# Altium PCB S7CAS-PLEIADES-CARTE-MERE_P01.PcbDoc (part 2 of 3)
Units mil, origin at the board's own origin, x right, y up, seen from the top; angles counter-clockwise.
Board outline 5000 x 5000 mil, 4 copper layers (Top, Ground Plane, Power Plane, Bottom), stack 67.086 mil thick; 430 components, 327 nets, 2174 pads, 171 vias.
Unrouted connection lines stored in the file: 1387.
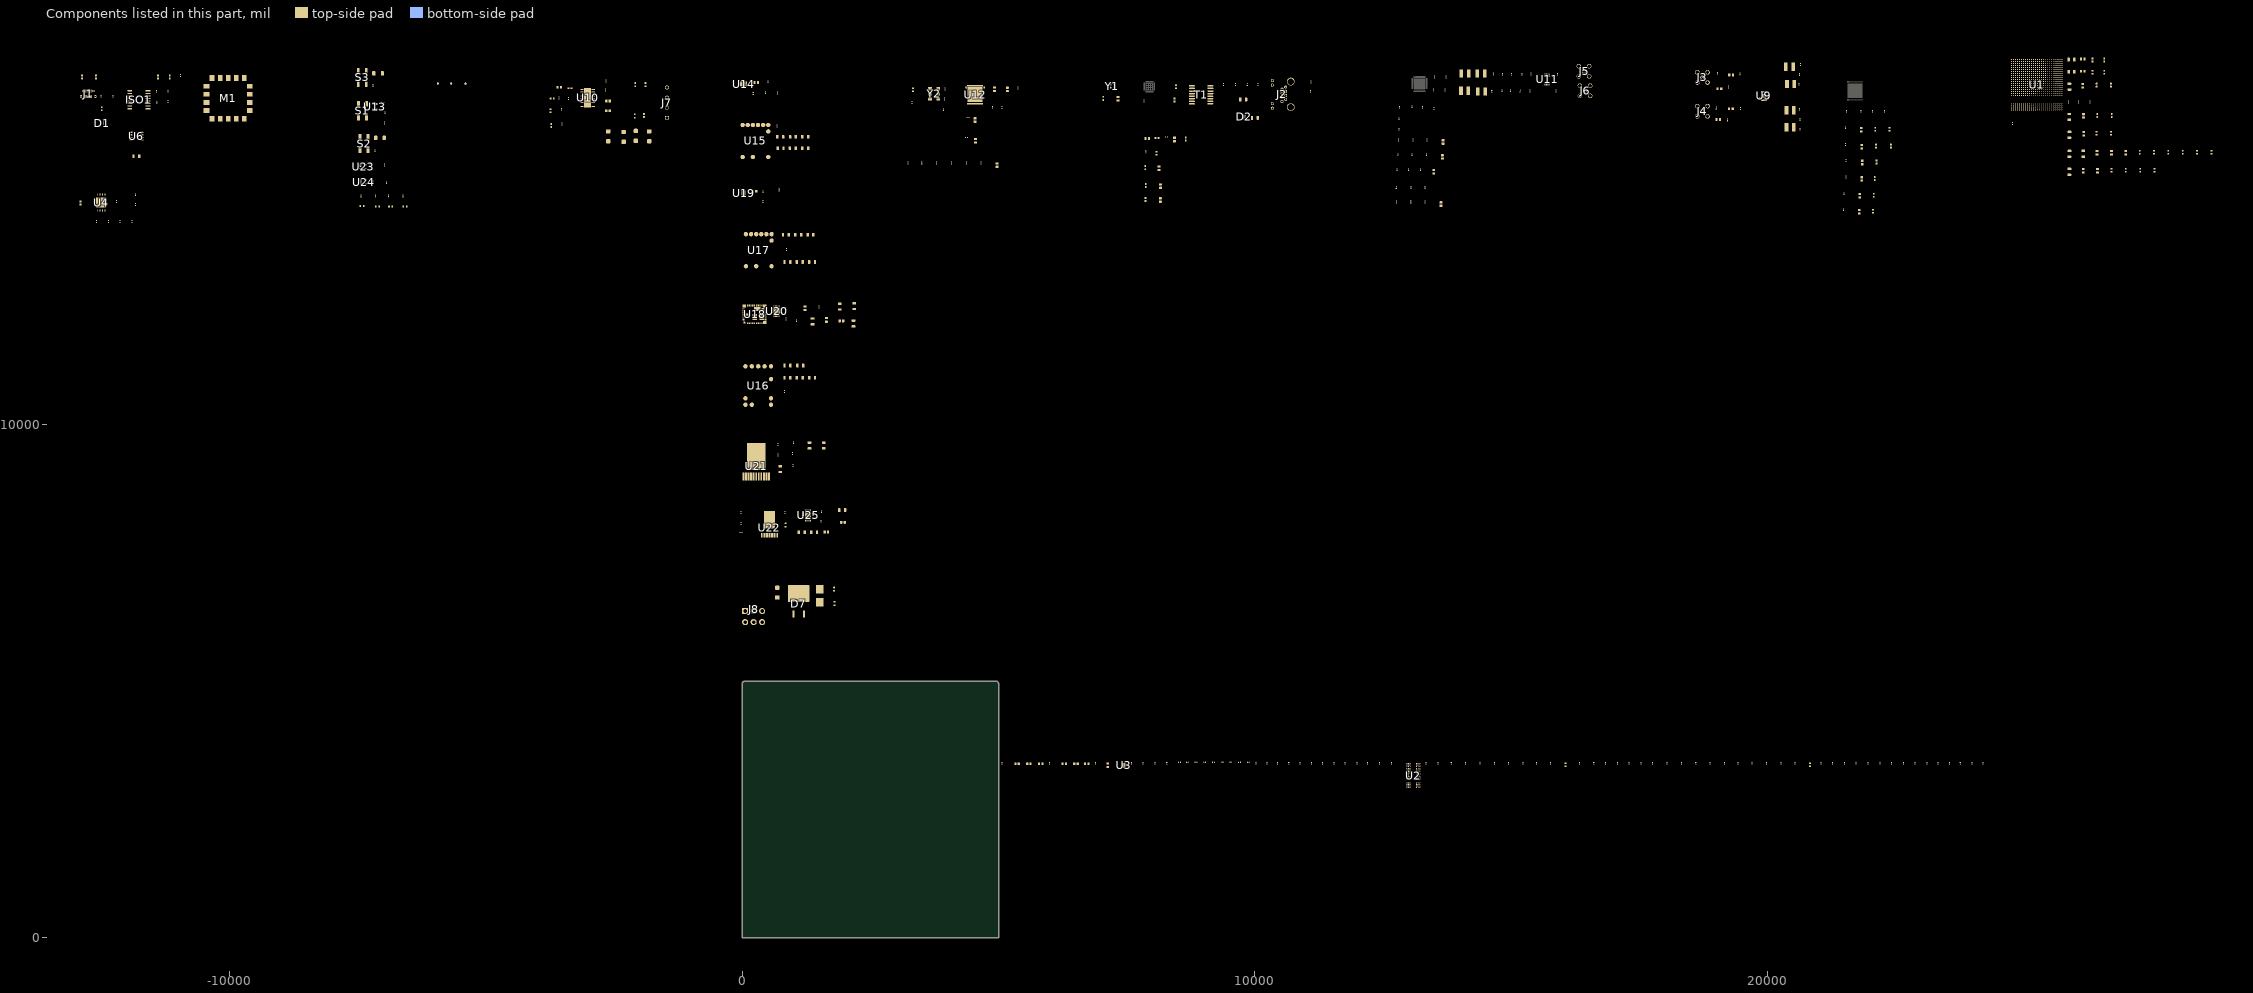
[diagram p4: the components of this part, seen from the top]

## Footprints (in the part's own frame and the unit in brackets; to place one, negate y for a bottom-side part, rotate by r counter-clockwise, add the part's x,y. Pads: shape width x height; smd on the part's side, far side on the other; paste and mask are expansions set on the pad) (continued)
FPGA_XILINX_FGG676 [mm]
  round 0.45 smd mask+0.05: A1(-12.5,12.5) A2(-11.5,12.5) A3(-10.5,12.5) A4(-9.5,12.5) A5(-8.5,12.5) A6(-7.5,12.5) A7(-6.5,12.5) A8(-5.5,12.5) A9(-4.5,12.5) A10(-3.5,12.5) A11(-2.5,12.5) A12(-1.5,12.5) A13(-0.5,12.5) A14(0.5,12.5) A15(1.5,12.5) A16(2.5,12.5) A17(3.5,12.5) A18(4.5,12.5) A19(5.5,12.5) A20(6.5,12.5) A21(7.5,12.5) A22(8.5,12.5) A23(9.5,12.5) A24(10.5,12.5) A25(11.5,12.5) A26(12.5,12.5) AA1(-12.5,-7.5) AA2(-11.5,-7.5) AA3(-10.5,-7.5) AA4(-9.5,-7.5) AA5(-8.5,-7.5) AA6(-7.5,-7.5) AA7(-6.5,-7.5) AA8(-5.5,-7.5) AA9(-4.5,-7.5) AA10(-3.5,-7.5) AA11(-2.5,-7.5) AA12(-1.5,-7.5) AA13(-0.5,-7.5) AA14(0.5,-7.5) AA15(1.5,-7.5) AA16(2.5,-7.5) AA17(3.5,-7.5) AA18(4.5,-7.5) AA19(5.5,-7.5) AA20(6.5,-7.5) AA21(7.5,-7.5) AA22(8.5,-7.5) AA23(9.5,-7.5) AA24(10.5,-7.5) AA25(11.5,-7.5) AA26(12.5,-7.5) AB1(-12.5,-8.5) AB2(-11.5,-8.5) AB3(-10.5,-8.5) AB4(-9.5,-8.5) AB5(-8.5,-8.5) AB6(-7.5,-8.5) AB7(-6.5,-8.5) AB8(-5.5,-8.5) AB9(-4.5,-8.5) AB10(-3.5,-8.5) AB11(-2.5,-8.5) AB12(-1.5,-8.5) AB13(-0.5,-8.5) AB14(0.5,-8.5) AB15(1.5,-8.5) AB16(2.5,-8.5) AB17(3.5,-8.5) AB18(4.5,-8.5) AB19(5.5,-8.5) AB20(6.5,-8.5) AB21(7.5,-8.5) AB22(8.5,-8.5) AB23(9.5,-8.5) AB24(10.5,-8.5) AB25(11.5,-8.5) AB26(12.5,-8.5) AC1(-12.5,-9.5) AC2(-11.5,-9.5) AC3(-10.5,-9.5) AC4(-9.5,-9.5) AC5(-8.5,-9.5) AC6(-7.5,-9.5) AC7(-6.5,-9.5) AC8(-5.5,-9.5) AC9(-4.5,-9.5) AC10(-3.5,-9.5) AC11(-2.5,-9.5) AC12(-1.5,-9.5) AC13(-0.5,-9.5) AC14(0.5,-9.5) AC15(1.5,-9.5) AC16(2.5,-9.5) AC17(3.5,-9.5) AC18(4.5,-9.5) AC19(5.5,-9.5) AC20(6.5,-9.5) AC21(7.5,-9.5) AC22(8.5,-9.5) AC23(9.5,-9.5) AC24(10.5,-9.5) AC25(11.5,-9.5) AC26(12.5,-9.5) AD1(-12.5,-10.5) AD2(-11.5,-10.5) AD3(-10.5,-10.5) AD4(-9.5,-10.5) AD5(-8.5,-10.5) AD6(-7.5,-10.5) AD7(-6.5,-10.5) AD8(-5.5,-10.5) AD9(-4.5,-10.5) AD10(-3.5,-10.5) AD11(-2.5,-10.5) AD12(-1.5,-10.5) AD13(-0.5,-10.5) AD14(0.5,-10.5) AD15(1.5,-10.5) AD16(2.5,-10.5) AD17(3.5,-10.5) AD18(4.5,-10.5) AD19(5.5,-10.5) AD20(6.5,-10.5) AD21(7.5,-10.5) AD22(8.5,-10.5) AD23(9.5,-10.5) AD24(10.5,-10.5) AD25(11.5,-10.5) AD26(12.5,-10.5) AE1(-12.5,-11.5) AE2(-11.5,-11.5) AE3(-10.5,-11.5) AE4(-9.5,-11.5) AE5(-8.5,-11.5) AE6(-7.5,-11.5) AE7(-6.5,-11.5) AE8(-5.5,-11.5) AE9(-4.5,-11.5) AE10(-3.5,-11.5) AE11(-2.5,-11.5) AE12(-1.5,-11.5) AE13(-0.5,-11.5) AE14(0.5,-11.5) AE15(1.5,-11.5) AE16(2.5,-11.5) AE17(3.5,-11.5) AE18(4.5,-11.5) AE19(5.5,-11.5) AE20(6.5,-11.5) AE21(7.5,-11.5) AE22(8.5,-11.5) AE23(9.5,-11.5) AE24(10.5,-11.5) AE25(11.5,-11.5) AE26(12.5,-11.5) AF1(-12.5,-12.5) AF2(-11.5,-12.5) AF3(-10.5,-12.5) AF4(-9.5,-12.5) AF5(-8.5,-12.5) AF6(-7.5,-12.5) AF7(-6.5,-12.5) AF8(-5.5,-12.5) AF9(-4.5,-12.5) AF10(-3.5,-12.5) AF11(-2.5,-12.5) AF12(-1.5,-12.5) AF13(-0.5,-12.5) AF14(0.5,-12.5) AF15(1.5,-12.5) AF16(2.5,-12.5) AF17(3.5,-12.5) AF18(4.5,-12.5) AF19(5.5,-12.5) AF20(6.5,-12.5) AF21(7.5,-12.5) AF22(8.5,-12.5) AF23(9.5,-12.5) AF24(10.5,-12.5) AF25(11.5,-12.5) AF26(12.5,-12.5) B1(-12.5,11.5) B2(-11.5,11.5) B3(-10.5,11.5) B4(-9.5,11.5) B5(-8.5,11.5) B6(-7.5,11.5) B7(-6.5,11.5) B8(-5.5,11.5) B9(-4.5,11.5) B10(-3.5,11.5) B11(-2.5,11.5) B12(-1.5,11.5) B13(-0.5,11.5) B14(0.5,11.5) B15(1.5,11.5) B16(2.5,11.5) B17(3.5,11.5) B18(4.5,11.5) B19(5.5,11.5) B20(6.5,11.5) B21(7.5,11.5) B22(8.5,11.5) B23(9.5,11.5) B24(10.5,11.5) B25(11.5,11.5) B26(12.5,11.5) C1(-12.5,10.5) C2(-11.5,10.5) C3(-10.5,10.5) C4(-9.5,10.5) C5(-8.5,10.5) C6(-7.5,10.5) C7(-6.5,10.5) C8(-5.5,10.5) C9(-4.5,10.5) C10(-3.5,10.5) C11(-2.5,10.5) C12(-1.5,10.5) C13(-0.5,10.5) C14(0.5,10.5) C15(1.5,10.5) C16(2.5,10.5) C17(3.5,10.5) C18(4.5,10.5) C19(5.5,10.5) C20(6.5,10.5) C21(7.5,10.5) C22(8.5,10.5) C23(9.5,10.5) C24(10.5,10.5) C25(11.5,10.5) C26(12.5,10.5) D1(-12.5,9.5) D2(-11.5,9.5) D3(-10.5,9.5) D4(-9.5,9.5) D5(-8.5,9.5) D6(-7.5,9.5) D7(-6.5,9.5) D8(-5.5,9.5) D9(-4.5,9.5) D10(-3.5,9.5) D11(-2.5,9.5) D12(-1.5,9.5) D13(-0.5,9.5) D14(0.5,9.5) D15(1.5,9.5) D16(2.5,9.5) D17(3.5,9.5) D18(4.5,9.5) D19(5.5,9.5) D20(6.5,9.5) D21(7.5,9.5) D22(8.5,9.5) D23(9.5,9.5) D24(10.5,9.5) D25(11.5,9.5) D26(12.5,9.5) E1(-12.5,8.5) E2(-11.5,8.5) E3(-10.5,8.5) E4(-9.5,8.5) E5(-8.5,8.5) E6(-7.5,8.5) E7(-6.5,8.5) E8(-5.5,8.5) E9(-4.5,8.5) E10(-3.5,8.5) E11(-2.5,8.5) E12(-1.5,8.5) E13(-0.5,8.5) E14(0.5,8.5) E15(1.5,8.5) E16(2.5,8.5) E17(3.5,8.5) E18(4.5,8.5) E19(5.5,8.5) E20(6.5,8.5) E21(7.5,8.5) E22(8.5,8.5) E23(9.5,8.5) E24(10.5,8.5) E25(11.5,8.5) E26(12.5,8.5) F1(-12.5,7.5) F2(-11.5,7.5) F3(-10.5,7.5) F4(-9.5,7.5) F5(-8.5,7.5) F6(-7.5,7.5) F7(-6.5,7.5) F8(-5.5,7.5) F9(-4.5,7.5) F10(-3.5,7.5) F11(-2.5,7.5) F12(-1.5,7.5) F13(-0.5,7.5) F14(0.5,7.5) F15(1.5,7.5) F16(2.5,7.5) F17(3.5,7.5) F18(4.5,7.5) F19(5.5,7.5) F20(6.5,7.5) F21(7.5,7.5) F22(8.5,7.5) F23(9.5,7.5) F24(10.5,7.5) F25(11.5,7.5) F26(12.5,7.5) G1(-12.5,6.5) G2(-11.5,6.5) G3(-10.5,6.5) G4(-9.5,6.5) G5(-8.5,6.5) G6(-7.5,6.5) G7(-6.5,6.5) G8(-5.5,6.5) G9(-4.5,6.5) G10(-3.5,6.5) G11(-2.5,6.5) G12(-1.5,6.5) G13(-0.5,6.5) G14(0.5,6.5) G15(1.5,6.5) G16(2.5,6.5) G17(3.5,6.5) G18(4.5,6.5) G19(5.5,6.5) G20(6.5,6.5) G21(7.5,6.5) G22(8.5,6.5) G23(9.5,6.5) G24(10.5,6.5) G25(11.5,6.5) G26(12.5,6.5) H1(-12.5,5.5) H2(-11.5,5.5) H3(-10.5,5.5) H4(-9.5,5.5) H5(-8.5,5.5) H6(-7.5,5.5) H7(-6.5,5.5) H8(-5.5,5.5) H9(-4.5,5.5) H10(-3.5,5.5) H11(-2.5,5.5) H12(-1.5,5.5) H13(-0.5,5.5) H14(0.5,5.5) H15(1.5,5.5) H16(2.5,5.5) H17(3.5,5.5) H18(4.5,5.5) H19(5.5,5.5) H20(6.5,5.5) H21(7.5,5.5) H22(8.5,5.5) H23(9.5,5.5) H24(10.5,5.5) H25(11.5,5.5) H26(12.5,5.5) J1(-12.5,4.5) J2(-11.5,4.5) J3(-10.5,4.5) J4(-9.5,4.5) J5(-8.5,4.5) J6(-7.5,4.5) J7(-6.5,4.5) J8(-5.5,4.5) J9(-4.5,4.5) J10(-3.5,4.5) J11(-2.5,4.5) J12(-1.5,4.5) J13(-0.5,4.5) J14(0.5,4.5) J15(1.5,4.5) J16(2.5,4.5) J17(3.5,4.5) J18(4.5,4.5) J19(5.5,4.5) J20(6.5,4.5) J21(7.5,4.5) J22(8.5,4.5) J23(9.5,4.5) J24(10.5,4.5) J25(11.5,4.5) J26(12.5,4.5) K1(-12.5,3.5) K2(-11.5,3.5) K3(-10.5,3.5) K4(-9.5,3.5) K5(-8.5,3.5) K6(-7.5,3.5) K7(-6.5,3.5) K8(-5.5,3.5) K9(-4.5,3.5) K10(-3.5,3.5) K11(-2.5,3.5) K12(-1.5,3.5) K13(-0.5,3.5) K14(0.5,3.5) K15(1.5,3.5) K16(2.5,3.5) K17(3.5,3.5) K18(4.5,3.5) K19(5.5,3.5) K20(6.5,3.5) K21(7.5,3.5) K22(8.5,3.5) K23(9.5,3.5) K24(10.5,3.5) K25(11.5,3.5) K26(12.5,3.5) L1(-12.5,2.5) L2(-11.5,2.5) L3(-10.5,2.5) L4(-9.5,2.5) L5(-8.5,2.5) L6(-7.5,2.5) L7(-6.5,2.5) L8(-5.5,2.5) L9(-4.5,2.5) L10(-3.5,2.5) L11(-2.5,2.5) L12(-1.5,2.5) L13(-0.5,2.5) L14(0.5,2.5) L15(1.5,2.5) L16(2.5,2.5) L17(3.5,2.5) L18(4.5,2.5) L19(5.5,2.5) L20(6.5,2.5) L21(7.5,2.5) L22(8.5,2.5) L23(9.5,2.5) L24(10.5,2.5) L25(11.5,2.5) L26(12.5,2.5) M1(-12.5,1.5) M2(-11.5,1.5) M3(-10.5,1.5) M4(-9.5,1.5) M5(-8.5,1.5) M6(-7.5,1.5) M7(-6.5,1.5) M8(-5.5,1.5) M9(-4.5,1.5) M10(-3.5,1.5) M11(-2.5,1.5) M12(-1.5,1.5) M13(-0.5,1.5) M14(0.5,1.5) M15(1.5,1.5) M16(2.5,1.5) M17(3.5,1.5) M18(4.5,1.5) M19(5.5,1.5) M20(6.5,1.5) M21(7.5,1.5) M22(8.5,1.5) M23(9.5,1.5) M24(10.5,1.5) M25(11.5,1.5) M26(12.5,1.5) N1(-12.5,0.5) N2(-11.5,0.5) N3(-10.5,0.5) N4(-9.5,0.5) N5(-8.5,0.5) N6(-7.5,0.5) N7(-6.5,0.5) N8(-5.5,0.5) N9(-4.5,0.5) N10(-3.5,0.5) N11(-2.5,0.5) N12(-1.5,0.5) N13(-0.5,0.5) N14(0.5,0.5) N15(1.5,0.5) N16(2.5,0.5) N17(3.5,0.5) N18(4.5,0.5) N19(5.5,0.5) N20(6.5,0.5) N21(7.5,0.5) N22(8.5,0.5) N23(9.5,0.5) N24(10.5,0.5) N25(11.5,0.5) N26(12.5,0.5) P1(-12.5,-0.5) P2(-11.5,-0.5) P3(-10.5,-0.5) P4(-9.5,-0.5) P5(-8.5,-0.5) P6(-7.5,-0.5) P7(-6.5,-0.5) P8(-5.5,-0.5) P9(-4.5,-0.5) P10(-3.5,-0.5) P11(-2.5,-0.5) P12(-1.5,-0.5) P13(-0.5,-0.5) P14(0.5,-0.5) P15(1.5,-0.5) P16(2.5,-0.5) P17(3.5,-0.5) P18(4.5,-0.5) P19(5.5,-0.5) P20(6.5,-0.5) P21(7.5,-0.5) P22(8.5,-0.5) P23(9.5,-0.5) P24(10.5,-0.5) P25(11.5,-0.5) P26(12.5,-0.5) R1(-12.5,-1.5) R2(-11.5,-1.5) R3(-10.5,-1.5) R4(-9.5,-1.5) R5(-8.5,-1.5) R6(-7.5,-1.5) R7(-6.5,-1.5) R8(-5.5,-1.5) R9(-4.5,-1.5) R10(-3.5,-1.5) R11(-2.5,-1.5) R12(-1.5,-1.5) R13(-0.5,-1.5) R14(0.5,-1.5) R15(1.5,-1.5) R16(2.5,-1.5) R17(3.5,-1.5) R18(4.5,-1.5) R19(5.5,-1.5) R20(6.5,-1.5) R21(7.5,-1.5) R22(8.5,-1.5) R23(9.5,-1.5) R24(10.5,-1.5) R25(11.5,-1.5) R26(12.5,-1.5) T1(-12.5,-2.5) T2(-11.5,-2.5) T3(-10.5,-2.5) T4(-9.5,-2.5) T5(-8.5,-2.5) T6(-7.5,-2.5) T7(-6.5,-2.5) T8(-5.5,-2.5) T9(-4.5,-2.5) T10(-3.5,-2.5) T11(-2.5,-2.5) T12(-1.5,-2.5) T13(-0.5,-2.5) T14(0.5,-2.5) T15(1.5,-2.5) T16(2.5,-2.5) T17(3.5,-2.5) T18(4.5,-2.5) T19(5.5,-2.5) T20(6.5,-2.5) T21(7.5,-2.5) T22(8.5,-2.5) T23(9.5,-2.5) T24(10.5,-2.5) T25(11.5,-2.5) T26(12.5,-2.5) U1(-12.5,-3.5) U2(-11.5,-3.5) U3(-10.5,-3.5) U4(-9.5,-3.5) U5(-8.5,-3.5) U6(-7.5,-3.5) U7(-6.5,-3.5) U8(-5.5,-3.5) U9(-4.5,-3.5) U10(-3.5,-3.5) U11(-2.5,-3.5) U12(-1.5,-3.5) U13(-0.5,-3.5) U14(0.5,-3.5) U15(1.5,-3.5) U16(2.5,-3.5) U17(3.5,-3.5) U18(4.5,-3.5) U19(5.5,-3.5) U20(6.5,-3.5) U21(7.5,-3.5) U22(8.5,-3.5) U23(9.5,-3.5) U24(10.5,-3.5) U25(11.5,-3.5) U26(12.5,-3.5) V1(-12.5,-4.5) V2(-11.5,-4.5) V3(-10.5,-4.5) V4(-9.5,-4.5) V5(-8.5,-4.5) V6(-7.5,-4.5) V7(-6.5,-4.5) V8(-5.5,-4.5) V9(-4.5,-4.5) V10(-3.5,-4.5) V11(-2.5,-4.5) V12(-1.5,-4.5) V13(-0.5,-4.5) V14(0.5,-4.5) V15(1.5,-4.5) V16(2.5,-4.5) V17(3.5,-4.5) V18(4.5,-4.5) V19(5.5,-4.5) V20(6.5,-4.5) V21(7.5,-4.5) V22(8.5,-4.5) V23(9.5,-4.5) V24(10.5,-4.5) V25(11.5,-4.5) V26(12.5,-4.5) W1(-12.5,-5.5) W2(-11.5,-5.5) W3(-10.5,-5.5) W4(-9.5,-5.5) W5(-8.5,-5.5) W6(-7.5,-5.5) W7(-6.5,-5.5) W8(-5.5,-5.5) W9(-4.5,-5.5) W10(-3.5,-5.5) W11(-2.5,-5.5) W12(-1.5,-5.5) W13(-0.5,-5.5) W14(0.5,-5.5) W15(1.5,-5.5) W16(2.5,-5.5) W17(3.5,-5.5) W18(4.5,-5.5) W19(5.5,-5.5) W20(6.5,-5.5) W21(7.5,-5.5) W22(8.5,-5.5) W23(9.5,-5.5) W24(10.5,-5.5) W25(11.5,-5.5) W26(12.5,-5.5) Y1(-12.5,-6.5) Y2(-11.5,-6.5) Y3(-10.5,-6.5) Y4(-9.5,-6.5) Y5(-8.5,-6.5) Y6(-7.5,-6.5) Y7(-6.5,-6.5) Y8(-5.5,-6.5) Y9(-4.5,-6.5) Y10(-3.5,-6.5) Y11(-2.5,-6.5) Y12(-1.5,-6.5) Y13(-0.5,-6.5) Y14(0.5,-6.5) Y15(1.5,-6.5) Y16(2.5,-6.5) Y17(3.5,-6.5) Y18(4.5,-6.5) Y19(5.5,-6.5) Y20(6.5,-6.5) Y21(7.5,-6.5) Y22(8.5,-6.5) Y23(9.5,-6.5) Y24(10.5,-6.5) Y25(11.5,-6.5) Y26(12.5,-6.5)
  silkscreen extent -13.75,-13.5 13.5,13.75, body extent -13.5,-13.53 13.5,13.47, height 2.24
FUS_0154XXX.DR [mil]
  rect 167x150 smd paste+0 mask+4: 1(-125.39,0) 2(125.39,0)
  silkscreen extent -224,-106 224,106, body extent -191,-98 191,98, height 145
ISO_ADUM3160BRWZ-RL [mil]
  rect 90.51x22.01 smd paste-1.97 mask+2.76: 1(-178.25,175) 2(-178.25,125) 3(-178.25,75) 4(-178.25,25) 5(-178.25,-25) 6(-178.25,-75) 7(-178.25,-125) 8(-178.25,-175) 9(178.25,-175) 10(178.25,-125) 11(178.25,-75) 12(178.25,-25) 13(178.25,25) 14(178.25,75) 15(178.25,125) 16(178.25,175)
  silkscreen extent -185,-214 156,221, body extent -210,-206 209,206, height 104
ISO_SI8620BB-B-IS [mm]
  oval 1.55x0.6 smd paste-0.025 mask+0.07: 1(-2.7,1.905) 2(-2.7,0.635) 3(-2.7,-0.635) 4(-2.7,-1.905) 5(2.7,-1.905) 6(2.7,-0.635) 7(2.7,0.635) 8(2.7,1.905)
  silkscreen extent -2.82,-2.5 1.6,2.88, body extent -3,-2.5 3,2.5, height 1.75
LED_0603 [mm] "Light Emitting Diode - Package 1608"
  rrect50% 0.8x1 smd: A(-0.825,0) K(0.825,0)
  silkscreen extent -0.2,-0.67 0.2,0.67, body extent -0.81,-0.38 0.81,0.42, height 1.1
MEM_DDR3_MT41J128M16JT-125 [mm]
  round 0.45 smd: A1(-3.2,6) A2(-2.4,6) A3(-1.6,6) A7(1.6,6) A8(2.4,6) A9(3.2,6) B1(-3.2,5.2) B2(-2.4,5.2) B3(-1.6,5.2) B7(1.6,5.2) B8(2.4,5.2) B9(3.2,5.2) C1(-3.2,4.4) C2(-2.4,4.4) C3(-1.6,4.4) C7(1.6,4.4) C8(2.4,4.4) C9(3.2,4.4) D1(-3.2,3.6) D2(-2.4,3.6) D3(-1.6,3.6) D7(1.6,3.6) D8(2.4,3.6) D9(3.2,3.6) E1(-3.2,2.8) E2(-2.4,2.8) E3(-1.6,2.8) E7(1.6,2.8) E8(2.4,2.8) E9(3.2,2.8) F1(-3.2,2) F2(-2.4,2) F3(-1.6,2) F7(1.6,2) F8(2.4,2) F9(3.2,2) G1(-3.2,1.2) G2(-2.4,1.2) G3(-1.6,1.2) G7(1.6,1.2) G8(2.4,1.2) G9(3.2,1.2) H1(-3.2,0.4) H2(-2.4,0.4) H3(-1.6,0.4) H7(1.6,0.4) H8(2.4,0.4) H9(3.2,0.4) J1(-3.2,-0.4) J2(-2.4,-0.4) J3(-1.6,-0.4) J7(1.6,-0.4) J8(2.4,-0.4) J9(3.2,-0.4) K1(-3.2,-1.2) K2(-2.4,-1.2) K3(-1.6,-1.2) K7(1.6,-1.2) K8(2.4,-1.2) K9(3.2,-1.2) L1(-3.2,-2) L2(-2.4,-2) L3(-1.6,-2) L7(1.6,-2) L8(2.4,-2) L9(3.2,-2) M1(-3.2,-2.8) M2(-2.4,-2.8) M3(-1.6,-2.8) M7(1.6,-2.8) M8(2.4,-2.8) M9(3.2,-2.8) N1(-3.2,-3.6) N2(-2.4,-3.6) N3(-1.6,-3.6) N7(1.6,-3.6) N8(2.4,-3.6) N9(3.2,-3.6) P1(-3.2,-4.4) P2(-2.4,-4.4) P3(-1.6,-4.4) P7(1.6,-4.4) P8(2.4,-4.4) P9(3.2,-4.4) R1(-3.2,-5.2) R2(-2.4,-5.2) R3(-1.6,-5.2) R7(1.6,-5.2) R8(2.4,-5.2) R9(3.2,-5.2) T1(-3.2,-6) T2(-2.4,-6) T3(-1.6,-6) T7(1.6,-6) T8(2.4,-6) T9(3.2,-6)
  silkscreen extent -5.31,-6.98 4.5,7.01, body extent -4.5,-7 4.5,7, height 1.05
MICT-VDFPN-8_M [mm] "SON, 8-Leads, Body 8x6mm, Pitch 1.27mm, Thermal Pad 5.16x4.8mm, IPC Low Density"
  rect 0.9x0.45 smd: 1(-3.99,1.905) 2(-3.99,0.635) 3(-3.99,-0.635) 4(-3.99,-1.905) 5(3.99,-1.905) 6(3.99,-0.635) 7(3.99,0.635) 8(3.99,1.905)
  rect 5.16x4.8 smd paste-2.58: 9(0,0)
  silkscreen extent -4.6,-3.15 4.15,3.2, body extent -4,-3 4,3, height 1
MOD_JTAG_410-357-B [mm]
  rect 2.3x2.8 smd paste-0.025 mask+0.07: 1(-8,-10.1) 2(-4,-10.1) 3(0,-10.1) 4(4,-10.1) 5(8,-10.1) 10(8,10.1) 11(4,10.1) 12(0,10.1) 13(-4,10.1) 14(-8,10.1)
  rect 2.8x2.3 smd paste-0.025 mask+0.07: 6(10.725,-6) 7(10.725,-2) 8(10.725,2) 9(10.725,6) 15(-10.725,6) 16(-10.725,2) 17(-10.725,-2) 18(-10.725,-6)
  silkscreen extent -11.57,-10.94 11.57,10.94, body extent -11.38,-10.75 11.38,10.75, height 2.5
NDW0007A_V [mm] "D2-PAK, 8-Leads, Body 9.9x10.2mm, Pitch 1.27mm, Lead Span 13.8mm, TI Recommended"
  rrect11% 2.41x0.89 smd: 1(-5.35,3.81) 2(-5.35,2.54) 3(-5.35,1.27) 4(-5.35,0) 5(-5.35,-1.27) 6(-5.35,-2.54) 7(-5.35,-3.81)
  rrect2% 8.54x5.35 smd: 8(2.28,0)
  silkscreen extent -5.47,-5.15 -2.7,5.15, body extent -2.55,-5.2 7.55,5.2, height 4.67
NDY0011A_M [mm] "DPAK, 11-Leads, Body 15.25x15.25mm, Pitch 1.27mm, IPC Low Density"
  rrect11% 3.9x0.9 smd: 1(-7.7,6.35) 2(-7.7,5.08) 3(-7.7,3.81) 4(-7.7,2.54) 5(-7.7,1.27) 6(-7.7,0) 7(-7.7,-1.27) 8(-7.7,-2.54) 9(-7.7,-3.81) 10(-7.7,-5.08) 11(-7.7,-6.35)
  rrect1% 13.37x9.126 smd: 12(2.25,0)
  silkscreen extent -7.82,-7.63 10,7.63, body extent -7.78,-7.5 10,7.5, height 6.11
OPAMP_AD8056ARMZ [mm] "SOP, 8-Leads, Body 3x3mm, Pitch 0.65mm, IPC Medium Density"
  oval 1.8x0.4 smd mask+0.07: 1(-2.075,0.975) 2(-2.075,0.325) 3(-2.075,-0.325) 4(-2.075,-0.975) 5(2.075,-0.975) 6(2.075,-0.325) 7(2.075,0.325) 8(2.075,0.975)
  silkscreen extent -2.2,-1.6 0.77,1.87, body extent -2.12,-1.53 2.07,1.52, height 1.3
OPAMP_ADA4927-2YCPZ-R2 [mm] "QFN, 24-Leads, Body 4,00x4,00mm, Pitch 0,50mm, Thermal Pad 2,10x2,10mm, IPC Low Density"
  oval 0.8x0.2 smd mask+0.075: 1(-2.05,1.25) 2(-2.05,0.75) 3(-2.05,0.25) 4(-2.05,-0.25) 5(-2.05,-0.75) 6(-2.05,-1.25) 13(2.05,-1.25) 14(2.05,-0.75) 15(2.05,-0.25) 16(2.05,0.25) 17(2.05,0.75) 18(2.05,1.25)
  oval 0.2x0.8 smd mask+0.075: 7(-1.25,-2.05) 8(-0.75,-2.05) 9(-0.25,-2.05) 10(0.25,-2.05) 11(0.75,-2.05) 12(1.25,-2.05) 19(1.25,2.05) 20(0.75,2.05) 21(0.25,2.05) 22(-0.25,2.05) 23(-0.75,2.05) 24(-1.25,2.05)
  rect 2.1x2.1 smd mask+0.075: PAD(0,0)
  silkscreen extent -2.92,-2.15 2.15,2.15, body extent -2,-2 2,2, height 1
OSC_590BD-BDG [mm]
  rect 1.95x1.55 smd paste-0.025 mask+0.07: 1(-2.1,2.54) 2(-2.1,0) 3(-2.1,-2.54) 4(2.1,-2.54) 5(2.1,0) 6(2.1,2.54)
  silkscreen extent -3.68,-3.81 2.54,3.81, body extent -2.54,-3.56 2.54,3.56, height 1.3
OSC_ASDMB-25.000MHZ-LC-T [mm]
  rrect50% 0.65x0.85 smd paste-0.025 mask+0.07: 1(-0.825,-0.775) 2(0.825,-0.775) 3(0.825,0.775) 4(-0.825,0.775)
  silkscreen extent -1.41,-1.56 1.35,1.1, body extent -1.25,-1 1.25,1, height 0.83
POW_MOTOR_DRV8811PWPR [mm] "TSOP, 28-Leads, Body 9,70x4,40mm, Pitch 0,65mm, Thermal Pad 9,70x3,40mm, IPC Medium Density"
  oval 1.6x0.3 smd: 1(-2.8,4.225) 2(-2.8,3.575) 3(-2.8,2.925) 4(-2.8,2.275) 5(-2.8,1.625) 6(-2.8,0.975) 7(-2.8,0.325) 8(-2.8,-0.325) 9(-2.8,-0.975) 10(-2.8,-1.625) 11(-2.8,-2.275) 12(-2.8,-2.925) 13(-2.8,-3.575) 14(-2.8,-4.225) 15(2.8,-4.225) 16(2.8,-3.575) 17(2.8,-2.925) 18(2.8,-2.275) 19(2.8,-1.625) 20(2.8,-0.975) 21(2.8,-0.325) 22(2.8,0.325) 23(2.8,0.975) 24(2.8,1.625) 25(2.8,2.275) 26(2.8,2.925) 27(2.8,3.575) 28(2.8,4.225)
  rect 3.4x9.7 smd paste-15 mask-15: PAD(0,0)
  silkscreen extent -2.92,4.8 -2.67,5.05, body extent -3.2,-4.9 3.2,4.9, height 1.2
POW_RESET_TPS3808 [mm]
  rect 0.6x1.05 smd paste-0.025 mask+0.07: 1(-0.95,-1.35) 2(0,-1.35) 3(0.95,-1.35) 4(0.95,1.35) 5(0,1.35) 6(-0.95,1.35)
  silkscreen extent -1.53,-2.46 1.53,2.1, body extent -1.5,-1.5 1.5,1.5, height 1.3
REG_LDO_NCP59744MN1ADJTBG [mm]
  rect 0.55x0.3 smd paste-0.025 mask+0.04: 1(-1.375,1) 2(-1.375,0.5) 3(-1.375,0) 4(-1.375,-0.5) 5(-1.375,-1) 6(1.375,-1) 7(1.375,-0.5) 8(1.375,0) 9(1.375,0.5) 10(1.375,1)
  rect 1.9x2.64 smd paste-2.64 mask+0.03: 11(0,0)
  silkscreen extent -2.25,-1.65 1.65,1.65, body extent -1.5,-1.5 1.5,1.5, height 1
REG_LDO_TPS7A3301RGWR [mm]
  rrect50% 0.35x1 smd paste-0.025 mask+0.07: 1(-1.3,-2.4) 2(-0.65,-2.4) 3(0,-2.4) 4(0.65,-2.4) 5(1.3,-2.4) 11(1.3,2.4) 12(0.65,2.4) 13(0,2.4) 14(-0.65,2.4) 15(-1.3,2.4)
  rrect50% 0.95x0.3 smd paste-0.025 mask+0.07: 6(2.4,-1.3) 7(2.4,-0.65) 8(2.4,0) 9(2.4,0.65) 10(2.4,1.3) 16(-2.4,1.3) 17(-2.4,0.65) 18(-2.4,0) 19(-2.4,-0.65) 20(-2.4,-1.3)
  rect 3.15x3.15 smd paste-3.15 mask+0: 21(0,0)
  silkscreen extent -2.7,-3.14 2.7,2.7, body extent -2.51,-2.51 2.51,2.51, height 0.88
REG_PMIC_TPS51200DRCT [mm]
  rrect41% 0.6x0.24 smd mask+0.07: 1(-1.4,1) 2(-1.4,0.5) 3(-1.4,0) 4(-1.4,-0.5) 5(-1.4,-1) 6(1.4,-1) 7(1.4,-0.5) 8(1.4,0) 9(1.4,0.5) 10(1.4,1)
  rrect5% 1.65x2.4 smd paste-5 mask+0.07: 11(0,0)
  Top region: 0.175,-1.7 0.165,-1.7 0.147,-1.692 0.133,-1.678 0.125,-1.66 0.125,-1.65 0.125,-1.65 0.125,1.65 0.125,1.66 0.133,1.678 0.147,1.692 0.165,1.7 0.175,1.7 0.175,1.7 0.325,1.7 0.335,1.7 0.353,1.692 0.367,1.678 0.375,1.66 0.375,1.65 0.375,1.65 0.375,-1.65 0.375,-1.66 0.367,-1.678 0.353,-1.692 0.335,-1.7 0.325,-1.7 0.325,-1.7
  Top region: -0.325,-1.7 -0.335,-1.7 -0.353,-1.692 -0.367,-1.678 -0.375,-1.66 -0.375,-1.65 -0.375,-1.65 -0.375,1.65 -0.375,1.66 -0.367,1.678 -0.353,1.692 -0.335,1.7 -0.325,1.7 -0.325,1.7 -0.175,1.7 -0.165,1.7 -0.147,1.692 -0.133,1.678 -0.125,1.66 -0.125,1.65 -0.125,1.65 -0.125,-1.65 -0.125,-1.66 -0.133,-1.678 -0.147,-1.692 -0.165,-1.7 -0.175,-1.7 -0.175,-1.7
  silkscreen extent -2.05,-1.7 1.7,1.7, body extent -1.55,-1.55 1.55,1.55, height 1
REG_SWR_LMZ34002RKGR [mm]
  round 1 smd paste-1.7 mask-1.7: 1(-5.05,-4.1)
  rect 0.6x0.95 smd paste-0.025 mask+0.07: 2(-3.6,-4.425) 3(-2.7,-4.425) 4(-1.8,-4.425) 5(-0.9,-4.425) 6(0,-4.425) 7(0.9,-4.425) 8(1.8,-4.425) 9(2.7,-4.425) 10(3.6,-4.425) 20(3.6,4.425) 21(2.7,4.425) 22(1.8,4.425) 23(0.9,4.425) 24(0,4.425) 25(-0.9,4.425) 26(-1.8,4.425) 27(-2.7,4.425) 28(-3.6,4.425)
  rect 1.7x1.6 smd paste-2 mask+0.07: 11(5.05,-4.1) 19(5.05,4.1) 29(-5.05,4.1)
  rect 0.95x0.6 smd paste-0.025 mask+0.07: 12(5.425,-2.7) 13(5.425,-1.8) 14(5.425,-0.9) 15(5.425,0) 16(5.425,0.9) 17(5.425,1.8) 18(5.425,2.7) 30(-5.425,2.7) 31(-5.425,1.8) 32(-5.425,0.9) 33(-5.425,0) 34(-5.425,-0.9) 35(-5.425,-1.8) 36(-5.425,-2.7)
  rect 2.25x1.1 smd paste-2 mask+0.07: 37(-3.3,-0.22)
  rect 2.2x3.1 smd paste-3.1 mask+0.07: 38(0.11,-1.3)
  rect 2.2x3.1 smd paste-3.1 mask+0.05: 39(3.59,-1.32)
  rect 1.24x1.4 smd paste-2 mask+0.05: 40(4.06,2.33)
  rect 3.05x2.04 smd paste-3.05 mask+0.05: 41(1.32,2.65)
  Top region: -4.425,-1.37 -2.175,-1.37 -2.175,0.93 -4.425,0.93
  Top region: -5.9,-4.9 -5.9,-3.3 -4.95,-3.3 -4.2,-3.95 -4.2,-4.9
  silkscreen extent -6.1,-5.4 6.1,5.1, body extent -5.55,-4.55 5.55,4.55, height 2.95
REG_SWR_PTH04T231WAZ [mil]
  round 85 smd paste+0 mask+2.76: 1(-312.5,250) 2(-312.5,50) 3(-312.5,-250) 4(187.5,-250) 5(312.5,-250) 6(312.5,-150) 7(312.5,-50) 8(312.5,50) 9(312.5,150) 10(312.5,250)
  silkscreen extent -445,-330 392,330, body extent -370,-310 376,310, height 325
REG_SWR_PTH08T241WAZ [mil]
  round 85 smd paste+0 mask+2.76: 1(-375,250) 2(-375,125) 3(-375,-250) 4(-250,-250) 5(125,-250) 6(375,-250) 7(375,-125) 8(375,0) 9(375,125) 10(375,250) 11(-250,250)
  silkscreen extent -505,-330 455,330, body extent -455,-330 455,330, height 355
REG_TPS7A4701RGWR [mm]
  rrect50% 1x0.35 smd paste-0.025 mask+0.07: 1(-2.4,1.3) 2(-2.4,0.65) 3(-2.4,0) 4(-2.4,-0.65) 5(-2.4,-1.3) 11(2.4,-1.3) 12(2.4,-0.65) 13(2.4,0) 14(2.4,0.65) 15(2.4,1.3)
  rrect50% 0.35x1 smd paste-0.025 mask+0.07: 6(-1.3,-2.4) 7(-0.65,-2.4) 8(0,-2.4) 9(0.65,-2.4) 10(1.3,-2.4) 16(1.3,2.4) 17(0.65,2.4) 18(0,2.4) 19(-0.65,2.4) 20(-1.3,2.4)
  rrect10% 3.15x3.15 smd paste-1.575 mask+0: E1(0,0)
  silkscreen extent -3.59,-3.1 3.1,3.1, body extent -2.62,-2.62 2.63,2.63, height 1
RES_0402 [mil]
  rrect60% 20x20 smd: 1(-17.5,0) 2(17.5,0)
  silkscreen extent -32,-15 32,15, body extent -23,-11 23,11, height 16
RES_0603 [mil]
  rrect39% 31x35 smd: 1(-31.5,0) 2(31.5,0)
  silkscreen extent -58,-28 58,28, body extent -33,-16 33,16, height 22
RES_0805 [mil]
  rrect37% 43x55 smd: 1(-35.5,0) 2(35.5,0)
  silkscreen extent -68,-40 68,40, body extent -45,-27 45,27, height 30
RES_1206 [mil]
  rrect34% 47x71 smd: 1(-57,0) 2(57,0)
  silkscreen extent -91,-45 91,45, body extent -66,-34 66,34, height 33
SEN_TEMP_TC74A0-3.3VCTTR [mm]
  rect 1.05x0.6 smd paste-0.05 mask+0.07: 1(-1.3,0.95) 2(-1.3,0) 3(-1.3,-0.95) 4(1.3,-0.95) 5(1.3,0.95)
  silkscreen extent -2.47,-1.5 0.48,1.5, body extent -1.6,-1.58 1.6,1.53, height 1.45
SWI_TACT_B3SN-3012P [mm]
  rect 2.75x1.4 smd paste-0.025 mask+0.07: 1(-3.375,2) 2(3.375,2) 3(-3.375,-2) 4(3.375,-2)
  silkscreen extent -5.9,-3.3 5.1,3.3, body extent -3.05,-3.05 3.05,3.05, height 3.2
TIM_CDCE62005RGZT [mm] "QFN, 64-Leads, Body 9,00x9,00mm, Pitch 0,50mm, Thermal Pad 7,40x7,40mm, IPC Medium Density"
  oval 0.8x0.23 smd mask+0.07: 1(-4.475,3.75) 2(-4.475,3.25) 3(-4.475,2.75) 4(-4.475,2.25) 5(-4.475,1.75) 6(-4.475,1.25) 7(-4.475,0.75) 8(-4.475,0.25) 9(-4.475,-0.25) 10(-4.475,-0.75) 11(-4.475,-1.25) 12(-4.475,-1.75) 13(-4.475,-2.25) 14(-4.475,-2.75) 15(-4.475,-3.25) 16(-4.475,-3.75) 33(4.475,-3.75) 34(4.475,-3.25) 35(4.475,-2.75) 36(4.475,-2.25) 37(4.475,-1.75) 38(4.475,-1.25) 39(4.475,-0.75) 40(4.475,-0.25) 41(4.475,0.25) 42(4.475,0.75) 43(4.475,1.25) 44(4.475,1.75) 45(4.475,2.25) 46(4.475,2.75) 47(4.475,3.25) 48(4.475,3.75)
  oval 0.23x0.8 smd mask+0.07: 17(-3.75,-4.475) 18(-3.25,-4.475) 19(-2.75,-4.475) 20(-2.25,-4.475) 21(-1.75,-4.475) 22(-1.25,-4.475) 23(-0.75,-4.475) 24(-0.25,-4.475) 25(0.25,-4.475) 26(0.75,-4.475) 27(1.25,-4.475) 28(1.75,-4.475) 29(2.25,-4.475) 30(2.75,-4.475) 31(3.25,-4.475) 32(3.75,-4.475) 49(3.75,4.475) 50(3.25,4.475) 51(2.75,4.475) 52(2.25,4.475) 53(1.75,4.475) 54(1.25,4.475) 55(0.75,4.475) 56(0.25,4.475) 57(-0.25,4.475) 58(-0.75,4.475) 59(-1.25,4.475) 60(-1.75,4.475) 61(-2.25,4.475) 62(-2.75,4.475) 63(-3.25,4.475) 64(-3.75,4.475)
  rect 7.4x7.4 smd mask+0.07: PAD(0,0)
  silkscreen extent -5.5,-4.72 4.72,4.72, body extent -4.57,-4.57 4.57,4.57, height 1
TRANSFO_H1102NLT [mil]
  oval 115x30 smd: 1(-180,175) 2(-180,125) 3(-180,75) 4(-180,25) 5(-180,-25) 6(-180,-75) 7(-180,-125) 8(-180,-175) 9(180,-175) 10(180,-125) 11(180,-75) 12(180,-25) 13(180,25) 14(180,75) 15(180,125) 16(180,175)
  silkscreen extent -230,-248 110,248, body extent -175,-252 175,252, height 215
TVS_DATA_TPD4E05U06 [mm]
  rect 0.55x0.3 smd paste+0 mask+0.05: 1(-0.385,1) 2(-0.385,0.5) 4(-0.385,-0.5) 5(-0.385,-1) 6(0.385,-1) 7(0.385,-0.5) 9(0.385,0.5) 10(0.385,1)
  rect 0.55x0.4 smd paste+0 mask+0.05: 3(-0.385,0) 8(0.385,0)
  silkscreen extent -0.89,-1.45 0.55,1.45, body extent -0.55,-1.3 0.55,1.3, height 0.55
TVS_POW_SMLVT3V3 [mm]
  rrect50% 1.62x2.18 smd paste-0.025 mask+0.07: A(2.11,0) K(-2.11,0)
  silkscreen extent -2.5,-2.18 2.5,2.18, body extent -2.6,-1.97 2.6,1.97, height 2.61
TVS_PWR_SMBJ36CA [mm]
  rrect50% 2.16x2.26 smd paste+0 mask+0.102: 1(-2.45,0) 2(2.45,0)
  silkscreen extent -2.5,-2.1 2.5,2.1, body extent -2.6,-1.97 2.6,1.97, height 2.61
TVS_USB_TPD2E001DRLR [mm]
  rrect50% 0.45x0.3 smd paste-0.025 mask+0.05: 1(-0.675,0.5) 2(-0.675,0) 3(-0.675,-0.5) 4(0.675,-0.5) 5(0.675,0.5)
  silkscreen extent -0.73,-0.85 0.25,1.01, body extent -0.8,-0.8 0.8,0.8, height 0.49

## Part data
C1 C2 C66 C67 C69 C70 C71 C72 C76 C78 C106 C119 C120 C125 C156 C184 C186 C219: "0.1 µF ±10% 50V Ceramic Capacitor X7R 0603 (1608 Metric)", Mfg Part Number=C0603C104K5RACTU, Package=0603, Voltage=50V, CreatedBy="Jonathan Bouchard", Mfg=KEMET, Precision=10%
C3 C55 C56 C107 C188 C189 C192 C193 C196 C197 C200 C201: Mfg Part Number=C0402C471K8RACAUTO, Package=0402, Voltage=10V, CreatedBy="Jonathan Bouchard", Precision=10%
C4 C5 C6 C7 C8 C9 C14 C25 C38 C40 C62 C87 C88 C90 C91 C92 C96 C97 C98 C109 C110 C121 C126 C130 C134 C141 C142: "100 µF ±20% 6.3V Ceramic Capacitor X6T 1206 (3216 Metric)", Mfg Part Number=GRM31CD80J107MEA8K, Package=1206, Voltage=6.3V, CreatedBy="Jonathan Bouchard", Mfg="Murata Electronics", Precision=20%
C10 C15 C77: "0.22 µF ±10% 50V Ceramic Capacitor X7R 0805 (2012 Metric)", Mfg Part Number=C0805C224K5RACTU, Package=0805, Voltage=50V, CreatedBy="Jonathan Bouchard", Precision=10%
C11 C12 C13: "10000 pF ±10% 16V Ceramic Capacitor X7R 0402 (1005 Metric)", Mfg Part Number=C0402C103K4RACTU, Package=0402, Voltage=16V, CreatedBy="Jonathan Bouchard", Mfg=KEMET, Part Number #1=C0402C103K4RACTU, Precision=10%
C16 C153: Mfg Part Number=C0603C105K8RAC, Package=0603, Voltage=10V, CreatedBy="Jonathan Bouchard", Precision=10%
C17 C18 C19 C20 C21 C22 C23 C24 C29 C39 C42 C43 C44 C45 C49 C50 C93 C94 C95 C99 C100 C171 C172 C173 C174 C175 C176 C181 C182 C183: "0.1 µF ±10% 25V Ceramic Capacitor X7R 0402 (1005 Metric)", Mfg Part Number=CL05B104KA5NNNC, Package=0402, Voltage=25V, CreatedBy="Jonathan Bouchard", Mfg="Samsung Electro-Mechanics", Part Number #1=CL05B104KA5NNNC, Precision=10%
C26: "1000 pF ±10% 10V Ceramic Capacitor X7R 0805 (2012 Metric)", Mfg Part Number=C0805C102K8RACTU, Package=0805, Voltage=10V, CreatedBy="Jonathan Bouchard", Part Number #1=C0805C102K8RACTU, Precision=10%
C27 C28 C30 C31 C32 C36 C61 C113 C114 C115 C116: "10 µF ±10% 25V Ceramic Capacitor X5R 0805 (2012 Metric)", Mfg Part Number=CL21A106KAYNNNE, Package=0805, Voltage=25V, CreatedBy="Jonathan Bouchard", Mfg="Samsung Electro-Mechanics", Part Number #1=CL21A106KAYNNNE, Precision=10%
C33 C63 C81 C105 C117 C118 C122 C127 C131 C135 C136 C143 C144 C145 C191 C195 C199: "4.7 µF ±10% 50V Ceramic Capacitor X5R 0805 (2012 Metric)", Mfg Part Number=GRT21BR61H475KE13L, Package=0805, Voltage=50V, CreatedBy="Jonathan Bouchard", Mfg="Murata Electronics", Precision=10%
C34 C35 C64 C65 C123 C124 C128 C129 C132 C133 C137 C138 C139 C140 C146 C147 C148 C149 C150 C151 C178: Mfg Part Number=C0603X474K8RAC, Package=0603, Voltage=10V, CreatedBy="Jonathan Bouchard", Precision=10%
C37: "200 pF ±10% 10V Ceramic Capacitor X8R 0402 (1005 Metric)", Mfg Part Number=C0402C201K8HACTU, Package=0402, Voltage=10V, CreatedBy="Jonathan Bouchard", Mfg=KEMET, Part Number #1=C0402C201K8HACTU, Precision=10%
C41 C85 C86 C101 C157 C185 C187 C220: "22 µF ±20% 25V Ceramic Capacitor X5R 0805 (2012 Metric)", Mfg Part Number=CL21A226MAYNNNE, Package=0805, Voltage=25V, CreatedBy="Jonathan Bouchard", Mfg="Samsung Electro-Mechanics", Precision=20%
C46 C48: "1000 pF ±5% 1500V (1.5kV) Ceramic Capacitor C0G, NP0 1206 (3216 Metric)", Mfg Part Number=VJ1206A102JXRAT5Z, Package=1206, Voltage=1500V, CreatedBy="Jonathan Bouchard", Mfg="Vishay Vitramon", Part Number #1=VJ1206A102JXRAT5Z, Precision=5%
C47: "1000 pF ±10% 2500V (2.5kV) Ceramic Capacitor X7R 1206 (3216 Metric)", Mfg Part Number=CC1206KKX7RSAB102, Package=1206, Voltage=2500V, CreatedBy="Jonathan Bouchard", Mfg=YAGEO, Part Number #1=CC1206KKX7RSAB102, Precision=10%
C51 C52 C53 C54: "100 pF ±5% 50V Ceramic Capacitor C0G, NP0 0603 (1608 Metric)", Mfg Part Number=GRM1885C1H101JA01D, Package=0402, Voltage=50V, CreatedBy="Jonathan Bouchard", Mfg="Murata Electronics", Precision=5%
C57 C58 C60 C74 C75 C152 C154 C155 C158 C159 C160 C161 C162 C163 C164 C165 C167 C170 C203 C207 C210 C213 C216: Mfg Part Number=C0402C104K8RAC, Package=0402, Voltage=10V, CreatedBy="Jonathan Bouchard", Precision=10%
C59 C190 C194 C198 C202: Mfg Part Number=C0402C683K8RAC, Package=0402, Voltage=10V, CreatedBy="Jonathan Bouchard", Precision=10%
C68 C82 C83 C103 C104 C112: "47 µF ±20% 16V Ceramic Capacitor X5R 1206 (3216 Metric)", Mfg Part Number=EMK316BBJ476ML-T, Package=1206, Voltage=16V, CreatedBy="Jonathan Bouchard", Mfg="Taiyo Yuden", Precision=20%
C73 C89 C102: "2.2 µF ±10% 35V Ceramic Capacitor X5R 0402 (1005 Metric)", Mfg Part Number=GRM155R6YA225KE11D, Package=0402, Part Number #1=CL05A225KP5NSNC, Voltage=35V, CreatedBy="Jonathan Bouchard", Mfg="Murata Electronics", Precision=10%
C79 C80: "1000 pF ±10% 50V Ceramic Capacitor X7R 0603 (1608 Metric)", Mfg Part Number=C0603C102K5RACTU, Package=0603, Voltage=50V, CreatedBy="Jonathan Bouchard", Mfg=KEMET, Precision=10%
C84 C111: "1 µF ±10% 16V Ceramic Capacitor X5R 0402 (1005 Metric)", Mfg Part Number=CL05A105KO5NNNC, Package=0402, Voltage=16V, CreatedBy="Jonathan Bouchard", Mfg="Samsung Electro-Mechanics", Precision=10%
C108: "1.2 µF ±10% 25V Ceramic Capacitor X7R 1206 (3216 Metric)", Mfg Part Number=C1206C125K3RACTU, Package=1206, Voltage=25V, CreatedBy="Jonathan Bouchard", Mfg=KEMET, Precision=10%
C166 C204 C208 C211 C214 C217: Mfg Part Number=C0805C225K8RAC, Package=0805, Voltage=10V, CreatedBy="Jonathan Bouchard", Precision=10%
C168 C169 C205 C206 C209 C212 C215 C218: Mfg Part Number=C0603X222K8RAC, Package=0603, Voltage=10V, CreatedBy="Jonathan Bouchard", Precision=10%
C177: Mfg Part Number=C0402C472K8RAC, Package=0402, Voltage=10V, CreatedBy="Jonathan Bouchard", Precision=10%
C179 C221 C222 C223 C224 C225: Mfg Part Number=C0402C272K8RAC, Package=0402, Voltage=10V, CreatedBy="Jonathan Bouchard", Precision=10%
C180: Mfg Part Number=C0805C105K8RAC, Package=0805, Voltage=10V, CreatedBy="Jonathan Bouchard", Precision=10%
D1: library part TVS_USB_TPD2E001DRLR, "TVS - USB TVS DIODE 5.5V - SOT-553", Manufacturer #1="Texas Instruments", Package=SOT-553, Supplier Part Number 1=296-21883-1-ND, Temperature="-40°C ~ 85°C (TA)", Voltage Rating="5.5V (Max)", CreatedBy/Date="Jonathan Bouchard 2018-07-10", Cryo=UNKNOWN, GRAMS Lib Spec=2.8, HelpURL=http://www.ti.com/lit/ds/symlink/tpd2e001.pdf, Magnetic Material=YES, Mfg Part Number=TPD2E001DRLR, Part Number #1=TPD2E001DRLR, Polarized=YES, Supplier 1=Digi-Key, VerifiedBy="Arnaud Samson 16-07-18"
D2: library part TVS_DATA_TPD4E05U06, "TVS - TVS DIODE 5.5VWM 14VC - 10SON", Current Rating="2.5A (8/20µs)", Manufacturer #1="Texas Instruments", Mfg Part Number=TPD4E05U06DQAR, Package=10-USON, Power Max="40 W (peak)", Supplier Part Number 1=296-35765-1-ND, Temperature="-40°C ~ 125°C", Voltage Rating="6V (Breakdown)", CreatedBy/Date="Olivier Bernard / 12/3/2018", Cryo=UNKNOWN, GRAMS Lib Spec=2.8, HelpURL=http://www.ti.com/lit/ds/symlink/tpd4e05u06.pdf, Magnetic Material=UNKNOWN, Part Number #1=TPD4E05U06DQAR, Polarized=YES, Supplier 1=Digi-Key, VerifiedBy="Caroline Paulin / 4 juillet 2018"
D3 D4 D5 D6: library part LED_SML-311DTT86, "LED - 611nM ORANGE 2mA - 0603", Current=2mA, Package=0603, Power=44mW, Supplier Part Number 1=511-1303-1-ND, Temperature="-40°C to 85°C", Voltage=1.8V, CreatedBy="Jonathan Bouchard", HelpURL=http://media.digikey.com/pdf/Data%20Sheets/Rohm%20PDFs/SML-311%20Series.pdf, Mfg="ROHM Semiconductor", Mfg Part Number=SML-311DTT86, Supplier 1=Digikey
D7: library part DIO_SCHOTTKY_MBRB4030T4G, "DIO - 30V MAX 40 A - TO-263-3", Current Rating=40A, Manufacturer #1="ON Semiconductor", Package=D2PAK, Supplier Part Number 1=MBRB4030T4GOSCT-ND, Temperature="-65°C ~ 175°C", Voltage Rating=30V, CreatedBy/Date="Arnaud Samson - 06/07/18", Cryo=UNKNOWN, GRAMS Lib Spec=2.8, HelpURL=http://www.onsemi.com/pub/Collateral/MBRB4030-D.PDF, Magnetic Material=NO, Mfg Part Number=MBRB4030T4G, Part Number #1=MBRB4030T4G, Polarized=Yes, Supplier 1=Digi-Key, VerifiedBy="Jonathan Bouchard 2018-07-12"
D8 D9: library part TVS_POW_SMLVT3V3, "TVS - 3.3V 10.3V 600W - DO214AA", Current Rating="200A (Ifsm)", Manufacturer #1=STMicroelectronics, Package=DO214AA, Power Max="600W (Ppp)", Supplier Part Number 1=497-2496-1-ND, Temperature="-55°C ~ 175°C (TJ)", Voltage Rating="3.3V Standoff", CreatedBy/Date="Jonathan Bouchard - 2019-04-27", Cryo=UNKNOWN, GRAMS Lib Spec=2.8, HelpURL=https://www.st.com/content/ccc/resource/technical/document/datasheet/da/a4/86/90/17/13/47/7c/CD00000923.pdf/files/CD00000923.pdf/jcr:content/translations/en.CD00000923.pdf, Magnetic Material=UNKNOWN, Mfg Part Number=SMLVT3V3, Part Number #1=SMLVT3V3, Polarized=YES, Supplier 1=Digi-Key, VerifiedBy="Nicolas V. (2019-05-06)"
D10: library part LED_SML-311UTT86, "LED - 620nM RED 2mA - 0603", Current=2mA, Package=0603, Power=44mW, Supplier Part Number 1=511-1304-1-ND, Temperature="-30°C to 85°C", Voltage=1.8V, CreatedBy="Jonathan Bouchard", HelpURL=http://media.digikey.com/pdf/Data%20Sheets/Rohm%20PDFs/SML-311%20Series.pdf, Mfg="ROHM Semiconductor", Mfg Part Number=SML-311UTT86, Supplier 1=Digikey
D15 D?? D?? D?? D??: library part TVS_PWR_SMBJ24CA, "TVS - 24V 26.7V 600W - DO214AA", Current Rating=15.5A, Manufacturer #1="Littelfuse Inc.", Package=DO214AA, Power Max=600W, Supplier Part Number 1=SMBJ24CALFCT-ND, Temperature="-65°C ~ 150°C (TJ)", Voltage Rating="24V Standoff", Assembly Type=SMD, CreatedBy/Date="Arnaud Samson - 06/07/18", Cryo=UNKNOWN, GRAMS Lib Spec=2.8, HelpURL=http://www.littelfuse.com/~/media/electronics/datasheets/tvs_diodes/littelfuse_tvs_diode_smbj_datasheet.pdf.pdf, Magnetic Material=UNKNOWN, Part Number #1=SMBJ24CA, Polarized=NO, Supplier 1=Digi-Key, VerifiedBy="Jonathan Bouchard - 2018-07-13"
F1: library part FUS_0154005.DR, "FUS - 5 A 125 VAC/VDC - 2-SMD", Current Rating=5A, Manufacturer #1="Littelfuse Inc.", Package=2-SMD, Supplier Part Number 1=F1228CT-ND, Temperature="-55°C ~ 125°C", Voltage Rating=125V, CreatedBy/Date="Arnaud Samson - 06/07/18", Cryo=UNKNOWN, GRAMS Lib Spec=2.8, HelpURL=http://www.littelfuse.com/~/media/electronics/datasheets/fuses/littelfuse_fuse_154_154t_154l_154tl_datasheet.pdf.pdf, Magnetic Material=UNKNOWN, Mfg Part Number=0154005.DR, Part Number #1=0154005.DR, Polarized=NO, Supplier 1=Digi-Key, VerifiedBy="Jonathan Bouchard 2018-07-16"
FID1 FID2 FID3: library part FID_CIRCLE_1MM, "FID - FIDUCIAL 1MM CIRCLE DOUBLE-SIDED - 1MM", Package="1MM CIRCLE", CreatedBy/Date="Jonathan Bouchard 2018-07-23", Cryo=UNKNOWN, GRAMS Lib Spec=2.8, HelpURL=https://www.pcb-3d.com/wordpress/wp-content/uploads/ipc-sm-782a_amendment_1_and_2.pdf, Magnetic Material=NO, VerifiedBy="Caroline Paulin - 25 juillet 2018"
ISO1: library part ISO_ADUM3160BRWZ-RL, "ISO - DGTL ISO 2.5KV 2CH USB - 16SOIC", Manufacturer #1="Analog Devices", Package=16-SOIC, Supplier Part Number 1=ADUM3160BRWZ-RLCT-ND, Temperature="-40°C ~ 105°C", Voltage Rating=3~5.5V, CreatedBy/Date="Tommy Rossignol 2018-11-16", Cryo=UNKNOWN, GRAMS Lib Spec=2.8, HelpURL=https://www.analog.com/media/en/technical-documentation/data-sheets/ADuM3160.pdf, Magnetic Material=UNKNOWN, Mfg Part Number=ADUM3160BRWZ-RL, Part Number #1=ADUM3160BRWZ-RL, Polarized=Yes, Supplier 1=Digi-Key, VerifiedBy="Caroline Paulin - 13 février 2019"
J1: library part CON_USB_10118194-0001LF, "CON - USB MICRO B RECPT SMT R/A - 4PIN", Current Rating=1.8A, Manufacturer #1="Amphenol FCI", Package=5-SMD, Supplier Part Number 1=609-4618-1-ND, Temperature="-30°C ~ 80°C", Voltage Rating=100VAC, CreatedBy/Date="Arnaud Samson - 09/07/18", Cryo=UNKNOWN, GRAMS Lib Spec=2.8, HelpURL=https://cdn.amphenol-icc.com/media/wysiwyg/files/drawing/10118194.pdf, Magnetic Material=YES, Mfg Part Number=10118194-0001LF, Part Number #1=10118194-0001LF, Polarized=YES, Supplier 1=Digi-Key, VerifiedBy="Jonathan Bouchard 2018-07-12"
J2: library part CONN_ETHERNET_RJHSE-5385, "CONN - MOD JACK RJ45 R/A ETHERNET - TH", Package=TH-12, Supplier Part Number 1=RJHSE-5385-ND, Temperature="-55°C ~ 85°C", CreatedBy="Jonathan Bouchard", HelpURL=https://www.amphenolcanada.com/ProductSearch/drawings/AC/RJHSE538X.pdf, Mfg=Amphenol, Mfg Part Number=RJHSE-5385, Part Number #1=RJHSE-5385, Supplier 1=Digikey
J3 J4 J5 J6: library part CONN_SMA_5-1814832-1, "CONN -  SMA JACK STR 50 OHM - TH", Package=TH-5, Supplier Part Number 1=A97594-ND, Temperature="-65°C ~ 165°C", CreatedBy="Jonathan Bouchard", HelpURL=http://www.te.com/commerce/DocumentDelivery/DDEController?Action=srchrtrv&DocNm=1814832&DocType=Customer+Drawing&DocLang=English, Mfg="TE Connectivity AMP Connectors", Mfg Part Number=5-1814832-1, Supplier 1=Digikey
J7: library part CONN_TERMINAL_OSTTC040162, "CONN -  TERMINAL BLOCK 4POS 5MM - TH", Package=TH-4, Supplier Part Number 1=ED2602-ND, Temperature="-30°C ~ 105°C", CreatedBy="Jonathan Bouchard", HelpURL=http://www.on-shore.com/wp-content/uploads/2015/09/osttcxx0162.pdf, Mfg="On Shore Technology Inc.", Mfg Part Number=OSTTC040162, Supplier 1=Digikey
J8: library part CON_MINIFIT_0039300060, "CON - Mini-Fit Through Hole, Right Angle 6 position", Current Rating=8A, Manufacturer #1=Molex, Package=TH, Supplier Part Number 1=WM21353-ND, Temperature="- 40°C to + 80°C", Voltage Rating=600V, CreatedBy/Date="Joel Lemay 2018-06-21", Cryo=UNKNOWN, GRAMS Lib Spec=2.8, HelpURL=https://www.molex.com/pdm_docs/sd/039300060_sd.pdf, Magnetic Material=Unknown, Mfg Part Number=0039300060, Part Number #1=0039300060, Polarized=Yes, Supplier 1=Digi-Key, VerifiedBy="Caroline Paulin - 10 sept 2018"
L1 L2 L3: "1 kOhms @ 100 MHz 1 Ferrite Bead 0402 (1005 Metric) 300mA 650mOhm", Current=300mA, Mfg Part Number=BLM15AG102SN1D, Package=0402, CreatedBy="Jonathan Bouchard", Mfg="Murata Electronics", Part Number #1=BLM15AG102SN1D
L4 L5 L6 L7 L8 L9 L10 L11: library part CMP-06042-001298-1, "Wire Wound Ferrite Inductor for Power Lines 1.2μH ±30% 0.0228Ω 3.1A 2020", Current Rating=3.1A, DC Resistance (DCR)=19mR, Inductance=120nH, Inductance Tolerance=30%, Max Operating Temperature=85°C, Package Quantity=500, Resistor Type=Wirewound, Saturation Current=5.4A, Self Resonant Frequency=90MHz, Test Frequency=100kHz, Height=2mm, Height - Seated (Max)=0.086inch, Length=0.197inch, Max DC Current=3.1A, Packaging="Tape and Reel", REACH SVHC="No SVHC", Shielding=Shielded, Termination=SMD/SMT, Tolerance=30%, Width=5mm
M1: library part MOD_JTAG_410-357-B, "MOD - JTAG-SMT3-NC Programming Module For Xilinx FPGA - 18-SMT", Manufacturer #1=Digilent, Package="18-pad SMT", Supplier Part Number 1=1286-1196-ND, Temperature="-40°C ~ 85°C", Voltage Rating="VDD: 2.97V~3.63V, VJTAG/VUART: 1.65V~5.5V", CreatedBy/Date="Tommy Rossignol 2018-11-23", Cryo=UNKNOWN, GRAMS Lib Spec=2.8, HelpURL=https://reference.digilentinc.com/_media/reference/programmers/jtag-smt3/jtag-smt3-nc_rm.pdf, Magnetic Material=Unknown, Mfg Part Number=410-357-B, Part Number #1=410-357-B, Polarized=Yes, Supplier 1=Digi-Key, VerifiedBy="Nicolas V. (2019-01-28)"
R1 R2 R3 R4 R5 R6 R7 R8 R9 R10 R11 R12 R13 R14 R15 R16 R17 R20 R21 R22 R23 R24 R26 R27: "40.2 Ohms ±1% 0.1W, 1/10W Chip Resistor 0402 (1005 Metric) Automotive AEC-Q200 Thick Film", Mfg Part Number=CRCW040240R2FKED, Package=0402, Power=1/16W, Voltage=75V, CreatedBy="Jonathan Bouchard", Part Number #1=CRCW040240R2FKED, Precision=1%
R25 R98 R99: "4.7 kOhms ±1% 0.063W, 1/16W Chip Resistor 0402 (1005 Metric) Moisture Resistant Thick Film", Mfg Part Number=RC0402FR-074K7L, Package=0402, Power=1/16W, Voltage=75V, CreatedBy="Jonathan Bouchard", Part Number #1=RC0402FR-074K7L, Precision=1%
R28: "240 Ohms ±1% 0.1W, 1/10W Chip Resistor 0402 (1005 Metric) Automotive AEC-Q200 Thick Film", Mfg Part Number=ERJ-2RKF2400X, Package=0402, Power=1/10W, Voltage=50V, CreatedBy="Jonathan Bouchard", Part Number #1=ERJ-2RKF2400X, Precision=1%
R29 R34 R35: "100 Ohms ±1% 0.1W, 1/10W Chip Resistor 0402 (1005 Metric) Automotive AEC-Q200 Thick Film", Mfg Part Number=RK73H1ETTP1000F, Package=0402, Power=1/10W, Voltage=75V, CreatedBy="Jonathan Bouchard", Part Number #1=RK73H1ETTP1000F, Precision=1%
R30 R31 R32 R41 R53 R57 R58 R65 R92 R93 R95 R96 R105 R106 R129 R130 R131 R132: "10 kOhms ±1% 0.063W, 1/16W Chip Resistor 0402 (1005 Metric) Automotive AEC-Q200 Thick Film", Mfg Part Number=RMCF0402FT10K0, Package=0402, Power=1/16W, Voltage=75V, CreatedBy="Jonathan Bouchard", Part Number #1=RMCF0402FT10K0, Precision=1%
R33 R54: "20 Ohms ±1% 0.063W, 1/16W Chip Resistor 0402 (1005 Metric) Moisture Resistant Thick Film", Mfg Part Number=RC0402FR-0720RL, Package=0402, Power=1/16W, Voltage=75V, CreatedBy="Jonathan Bouchard", Part Number #1=RC0402FR-0720RL, Precision=1%
R36 R37 R40: "4.7 kOhms ±1% 0.063W, 1/16W Chip Resistor 0402 (1005 Metric) Moisture Resistant Thick Film", Mfg Part Number=RC0402FR-074K7L, Package=0402, Power=1/16W, Voltage=50V, CreatedBy="Jonathan Bouchard", Part Number #1=RC0402FR-074K7L, Precision=1%
R38: "330 Ohms ±1% 0.063W, 1/16W Chip Resistor 0402 (1005 Metric) Moisture Resistant Thick Film", Mfg Part Number=RC0402FR-07330RL, Package=0402, Power=1/16W, Voltage=50V, CreatedBy="Jonathan Bouchard", Part Number #1=RC0402FR-07330RL, Precision=1%
R39: "2.4 kOhms ±5% 0.063W, 1/16W Chip Resistor 0402 (1005 Metric) Moisture Resistant Thick Film", Mfg Part Number=RC0402JR-072K4L, Package=0402, Power=1/16W, Voltage=50V, CreatedBy="Jonathan Bouchard", Part Number #1=RC0402JR-072K4L, Precision=5%
R42 R43 R44 R45: "24 Ohms ±1% 0.063W, 1/16W Chip Resistor 0402 (1005 Metric) Moisture Resistant Thick Film", Mfg Part Number=RC0402FR-0724RL, Package=0402, Power=1/16W, Voltage=50V, CreatedBy="Jonathan Bouchard", Part Number #1=RC0402FR-0724RL, Precision=1%
R46: "0 Ohms Jumper Chip Resistor 0603 (1608 Metric) Automotive AEC-Q200 Thick Film", Mfg Part Number=ERJ-3GEY0R00V, Package=0603, Voltage=75V, CreatedBy="Jonathan Bouchard", Mfg="Panasonic Electronic Components", Part Number #1=ERJ-3GEY0R00V, Precision=1%
R47: "220 Ohms ±1% 0.1W, 1/10W Chip Resistor 0402 (1005 Metric) Automotive AEC-Q200 Thick Film220", Mfg Part Number=ERJ-2RKF2200X, Package=0402, Power=1/10W, Voltage=50V, CreatedBy="Jonathan Bouchard", Mfg="Panasonic Electronic Components", Part Number #1=ERJ-2RKF2200X, Precision=1%
R48 R61 R64 R67 R68 R79 R80 R86 R90 R108 R109 R110 R111: "1 kOhms ±1% 0.1W, 1/10W Chip Resistor 0402 (1005 Metric) Automotive AEC-Q200 Thick Film", Mfg Part Number=ERJ-2RKF1001X, Package=0402, Power=1/10W, Voltage=50V, CreatedBy="Jonathan Bouchard", Mfg="Panasonic Electronic Components", Part Number #1=ERJ-2RKF1001X, Precision=1%
R49 R50 R51 R52: "75 Ohms ±5% 0.063W, 1/16W Chip Resistor 0402 (1005 Metric) Moisture Resistant Thick Film", Mfg Part Number=RC0402JR-0775RL, Package=0402, Power=1/16W, Voltage=50V, CreatedBy="Jonathan Bouchard", Mfg=YAGEO, Part Number #1=RC0402JR-0775RL, Precision=5%
R55 R122 R135: "90.9 kOhms ±1% 0.063W, 1/16W Chip Resistor 0402 (1005 Metric) Moisture Resistant Thick Film", Mfg Part Number=RC0402FR-0790K9L, Package=0402, Power=1/16W, Voltage=50V, CreatedBy="Jonathan Bouchard", Mfg=YAGEO, Precision=1%
R56 R119 R136: "12.1 kOhms ±1% 0.063W, 1/16W Chip Resistor 0402 (1005 Metric) Moisture Resistant Thick Film", Mfg Part Number=RC0402FR-0712K1L, Package=0402, Power=1/16W, Voltage=50V, CreatedBy="Jonathan Bouchard", Mfg=YAGEO, Precision=1%
R59 R60 R63 R72 R73 R91: "49.9 Ohms ±1% 0.1W, 1/10W Chip Resistor 0402 (1005 Metric) Automotive AEC-Q200 Thick Film", Mfg Part Number=CRCW040249R9FKED, Package=0402, Power=1/10W, Voltage=75V, CreatedBy="Jonathan Bouchard", Mfg="Vishay Dale", Part Number #1=CRCW040249R9FKED, Precision=1%
R62 R66 R69 R89: "500 kOhms ±0.1% 0.125W, 1/8W Chip Resistor 0805 (2012 Metric) Automotive AEC-Q200 Thin Film", Mfg Part Number=RNCF0805BTE500K, Package=0805, CreatedBy="Jonathan Bouchard", Mfg="Stackpole Electronics Inc", Precision=1%
R70 R71 R74 R76 R81 R83 R87 R88: "499 Ohms ±0.1% 0.063W, 1/16W Chip Resistor 0402 (1005 Metric) Automotive AEC-Q200 Thin Film", Mfg Part Number=ERA-2AEB4990X, Package=0402, Power=1/16W, Voltage=TBD, CreatedBy="Jonathan Bouchard", Mfg="Panasonic Electronic Components", Precision=0.1%
R75 R82: "44.2 Ohms ±1% 0.1W, 1/10W Chip Resistor 0402 (1005 Metric) Automotive AEC-Q200 Thick Film", Mfg Part Number=ERJ-2RKF44R2X, Package=0402, Power=1/10W, Voltage=TBD, CreatedBy="Jonathan Bouchard", Mfg="Panasonic Electronic Components", Precision=1%
R77 R78 R84 R85: "25 Ohms ±0.1% 0.05W, 1/20W Chip Resistor 0402 (1005 Metric) RF, High Frequency Thin Film", Mfg Part Number=FC0402E25R0BTT0, Package=0402, Power=1/20W, Voltage=TBD, CreatedBy="Jonathan Bouchard", Mfg="Vishay Dale Thin Film", Precision=0.01%
R94 R97: "100 mOhms ±1% 0.333W, 1/3W Chip Resistor 0603 (1608 Metric) Automotive AEC-Q200, Current Sense Thick Film", Mfg Part Number=ERJ-3BWFR100V, Package=0603, CreatedBy="Jonathan Bouchard", Mfg="Panasonic Electronic Components", Precision=1%
R100 R101 R102 R103: "750 Ohms ±0.1% 0.063W, 1/16W Chip Resistor 0402 (1005 Metric) Automotive AEC-Q200 Thin Film", Mfg Part Number=ERA-2ARB751X, Package=0402, Power=1/16W, Voltage=50V, CreatedBy="Jonathan Bouchard", Mfg="Panasonic Electronic Components", Precision=1%
R104 R112: "100 kOhms ±1% 0.063W, 1/16W Chip Resistor 0402 (1005 Metric) Moisture Resistant Thick Film", Mfg Part Number=RC0402FR-07100KL, Package=0402, Power=1/16W, Voltage=75V, CreatedBy="Jonathan Bouchard", Part Number #1=RC0402FR-07100KL, Precision=1%
R107: "11.1 kOhms ±0.1% 0.167W, 1/6W Chip Resistor 0603 (1608 Metric) Automotive AEC-Q200 Thin Film", Mfg Part Number=RNCF0603BTE11K1, Package=0603, CreatedBy="Jonathan Bouchard", Mfg="Stackpole Electronics Inc", Precision=1%
R113: "1.21 kOhms ±1% 0.063W, 1/16W Chip Resistor 0402 (1005 Metric) Automotive AEC-Q200 Thick Film", Mfg Part Number=RMCF0402FT1K21, Package=0402, Power=1/16W, Voltage=50V, CreatedBy="Jonathan Bouchard", Mfg="Stackpole Electronics Inc", Precision=1%
R114: "4.12 kOhms ±0.1% 0.063W, 1/16W Chip Resistor 0402 (1005 Metric) Automotive AEC-Q200 Thin Film", Mfg Part Number=ERA-2AEB4121X, Package=0402, Power=1/16W, Voltage=50V, CreatedBy="Jonathan Bouchard", Mfg="Panasonic Electronic Components", Precision=1%
R115 R116: "4.75 kOhms ±0.1% 0.063W, 1/16W Chip Resistor 0402 (1005 Metric) Automotive AEC-Q200 Thin Film", Mfg Part Number=ERA-2AEB4751X, Package=0402, Power=1/16W, Voltage=50V, CreatedBy="Jonathan Bouchard", Mfg="Panasonic Electronic Components", Precision=1%
R117: "3.57 kOhms ±1% 0.063W, 1/16W Chip Resistor 0402 (1005 Metric) Moisture Resistant Thick Film", Mfg Part Number=RC0402FR-073K57L, Package=0402, Power=1/16W, Voltage=50V, CreatedBy="Jonathan Bouchard", Mfg=YAGEO, Precision=1%
R118: "1.15 kOhms ±1% 0.1W, 1/10W Chip Resistor 0603 (1608 Metric) Automotive AEC-Q200 Thick Film", Mfg Part Number=ERJ-3EKF1151V, Package=0402, Power=1/16W, Voltage=50V, CreatedBy="Jonathan Bouchard", Mfg="Panasonic Electronic Components", Precision=1%
R120: "174 kOhms ±1% 0.063W, 1/16W Chip Resistor 0402 (1005 Metric) Moisture Resistant Thick Film", Mfg Part Number=RC0402FR-07174KL, Package=0402, Power=1/16W, Voltage=50V, CreatedBy="Jonathan Bouchard", Mfg=YAGEO, Precision=1%
R121: "11.5 kOhms ±1% 0.063W, 1/16W Chip Resistor 0402 (1005 Metric) Moisture Resistant Thick Film", Mfg Part Number=RC0402FR-0711K5L, Package=0402, Power=1/16W, Voltage=50V, CreatedBy="Jonathan Bouchard", Mfg=YAGEO, Precision=1%
R123 R128 R134: "10 kOhms ±1% 0.063W, 1/16W Chip Resistor 0402 (1005 Metric) Moisture Resistant Thick Film", Mfg Part Number=RC0402FR-0710KL, Package=0402, Power=1/16W, Voltage=50V, CreatedBy="Jonathan Bouchard", Mfg=YAGEO, Precision=1%
R124: "53 kOhms ±0.1% 0.063W, 1/16W Chip Resistor 0402 (1005 Metric) Thin Film", Mfg Part Number=RT0402BRD0753KL, Package=0402, Power=1/16W, Voltage=50V, CreatedBy="Jonathan Bouchard", Mfg=YAGEO, Precision=1%
R125: "332 kOhms ±0.1% 0.25W, 1/4W Chip Resistor 1206 (3216 Metric) Automotive AEC-Q200 Thin Film", Mfg Part Number=ERA-8AEB3323V, Package=1206, CreatedBy="Jonathan Bouchard", Mfg="Panasonic Electronic Components", Precision=1%